# Altium PCB PCB3.PcbDoc
Units mm, origin at the board's own origin, x right, y up, seen from the top; angles counter-clockwise.
Board outline 152.4 x 101.6 mm, 2 copper layers (Top Layer, Bottom Layer); 5 components, 4 nets, 30 pads, 2 vias.
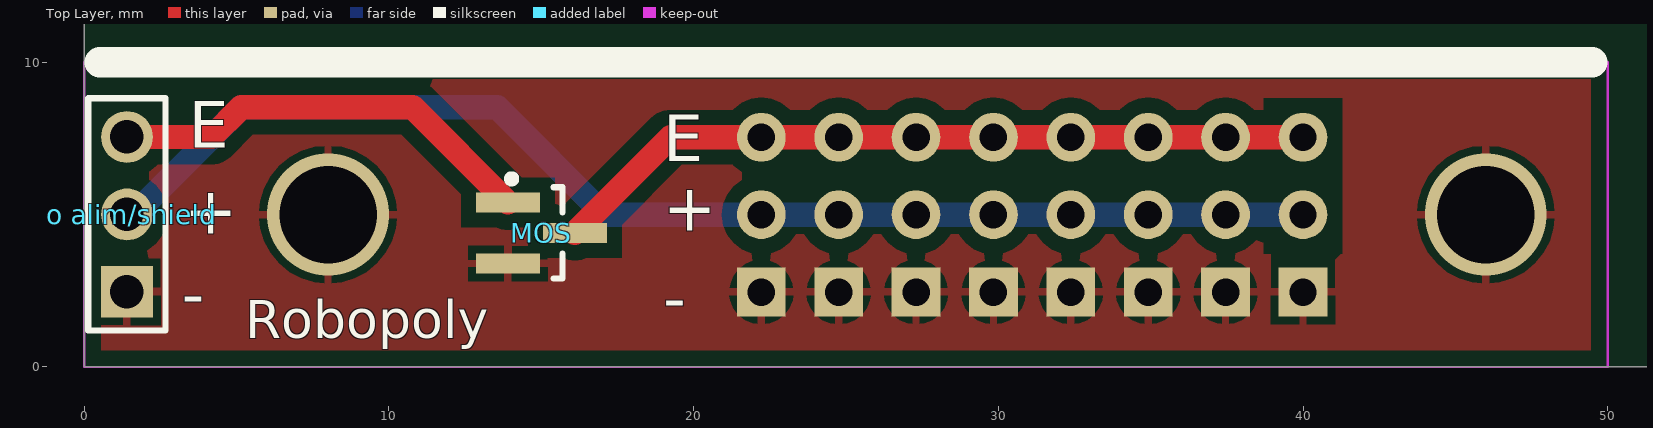
[diagram p0: Top Layer view]
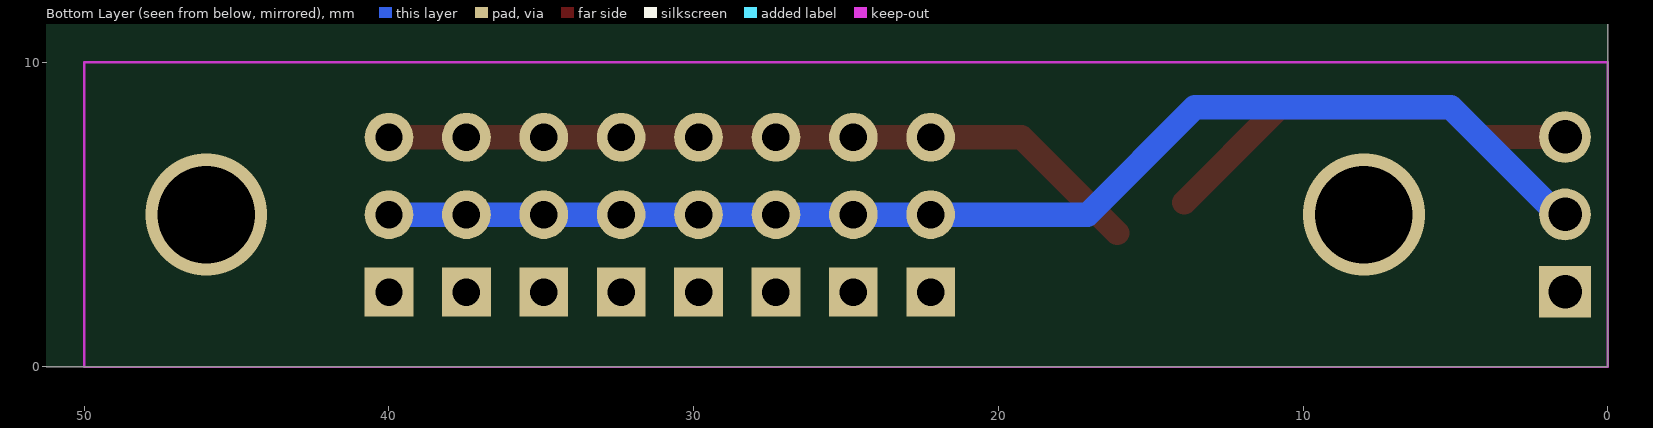
[diagram p1: Bottom Layer view, seen from below]
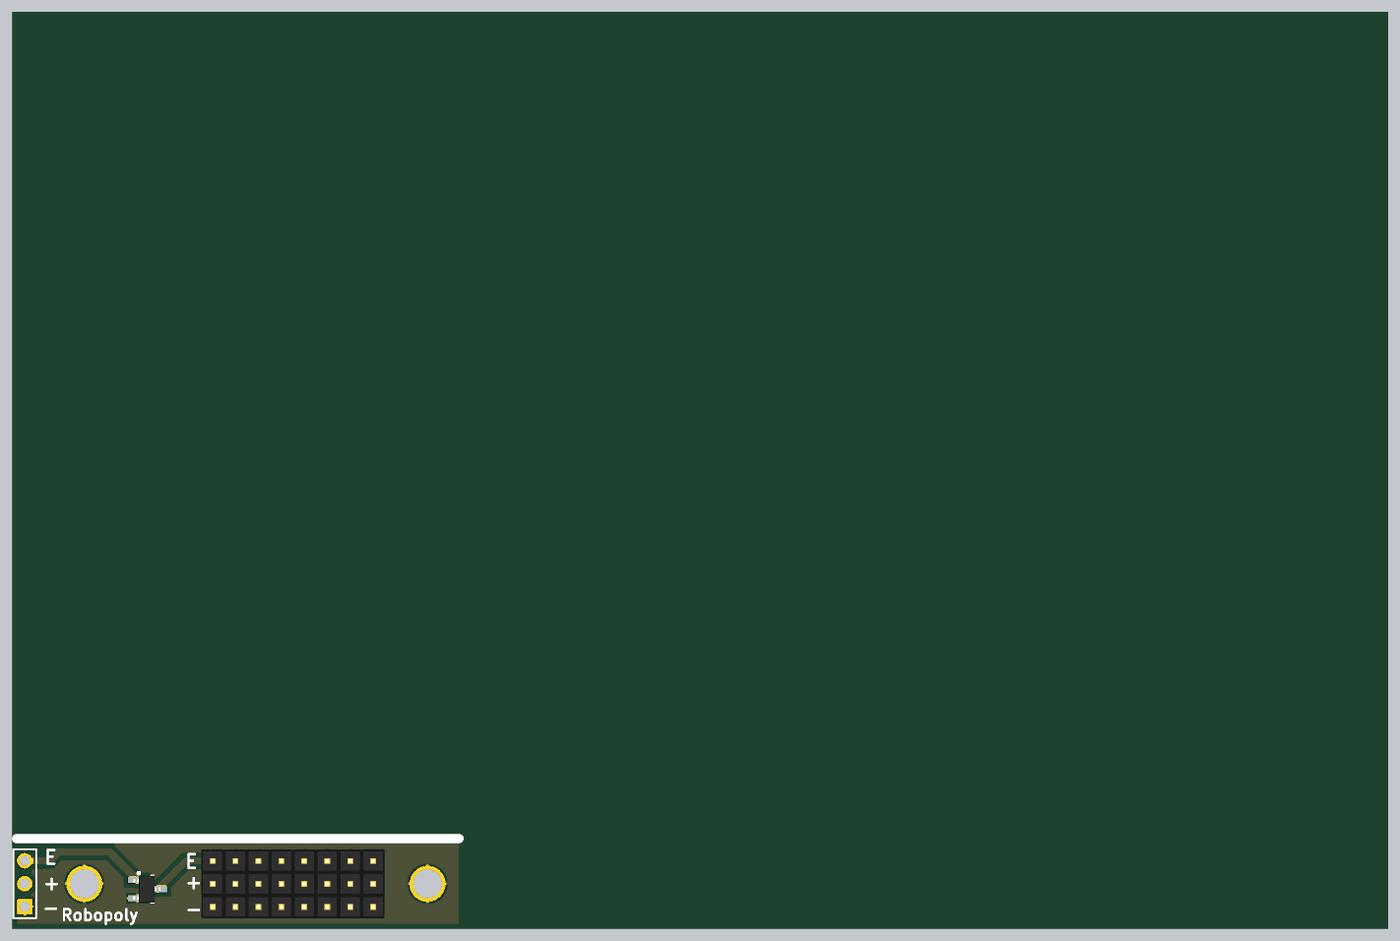
[diagram p2: 3D render of the assembled board from above, using the file's embedded part models]

## Layer stack, top to bottom
Top Layer: signal copper 0.0356
Dielectric: dielectric 0.32, FR-4, Dk 4.8
Bottom Layer: signal copper 0.0356

## Board outline
0,0 152.4,0 152.4,101.6 0,101.6

## Design rules (kind name [scope] priority, off if disabled: settings)
Clearance Clearance_Polygons [InPolygon] p1: gap=0.254
Clearance [All] p2: gap=0.15
HoleSize [All] p1: absolutevalues=TRUE maxlimit=6.2 minlimit=0.3 maxpercent=80.000 minpercent=20.000
MinimumSolderMaskSliver [All] p1 off: minsoldermaskwidth=0.15
MinimumSolderMaskSliver SilkscreenOverComponentPads [All] p2 off: minsoldermaskwidth=0.254
PolygonConnect PolygonConnect_via [All vs IsVia] p1: connectstyle=Direct reliefconductorwidth=0.254 reliefentries=4 polygonreliefangle="90 Angle" airgapwidth=0.254
PolygonConnect [All] p2: connectstyle=Relief reliefconductorwidth=0.254 reliefentries=4 polygonreliefangle="90 Angle" airgapwidth=0.254
RoutingVias [All] p1: holewidth=0.5 width=0.8 viastyle="Through Hole" minholewidth=0.35 minwidth=0.5 maxholewidth=1.5 maxwidth=2
SilkToSilkClearance [All] p1 off: silktosilkclearance=0.254
SolderMaskExpansion [All] p1: expansion=0.1
Width [All] p1: maxlimit=5 minlimit=0.2 preferedwidth=0.5
25 further rules are at their usual default settings.

## Classes and differential pairs
component class Sheet2: EN MOS "to alim/shield"

## Components (designator, comment, footprint, x,y, rotation, side; value= is the part's Value field where it differs from the comment)
+ "Header 8" HDR1X8#1 40,5 r180 top (schematic designator VCC)
- "Header 8" HDR1X8#2 40,2.46 r180 top (schematic designator GND)
E "Header 8" HDR1X8#1 40,7.54 r180 top (schematic designator ENABLE)
MOS "FDV305N" SOT23-3 15,4.4 r0 top
"to alim/shield" "Header 3" HDR1X3 1.4,7.55 r270 top

## Footprints (in the part's own frame and the unit in brackets; to place one, negate y for a bottom-side part, rotate by r counter-clockwise, add the part's x,y. Pads: shape width x height; smd on the part's side, far side on the other; paste and mask are expansions set on the pad)
HDR1X3 [mm] "Connector; Header; 3 Position"
  round 1.7 hole 1.1: 1(0,0) 2(2.54,0)
  rect 1.7x1.7 hole 1.1: 3(5.08,0)
  silkscreen extent -1.27,-1.27 6.35,1.27
HDR1X8#1 [mm] "Connector; Header; 8 Position"
  round 1.6 hole 0.9: 1(0,0) 2(2.54,0) 3(5.08,0) 4(7.62,0) 5(10.16,0) 6(12.7,0) 7(15.24,0) 8(17.78,0)
  body extent -1.25,-1.25 19.07,1.29, height 8.44
HDR1X8#2 [mm] "Connector; Header; 8 Position"
  rect 1.6x1.6 hole 0.9: 1(0,0) 2(2.54,0) 3(5.08,0) 4(7.62,0) 5(10.16,0) 6(12.7,0) 7(15.24,0) 8(17.78,0)
  body extent -1.25,-1.25 19.07,1.29, height 8.44
SOT23-3 [mm] "SOT23, 3-Leads, Body 3.0x2.6mm (max), Pitch 0.95mm, IPC Low Density"
  rect 2.1x0.65 smd: 1(-1.1,1) 2(-1.1,-1) 3(1.1,0)
  silkscreen extent -1.1,-1.5 0.7,1.9, body extent -1.57,-1.5 1.42,1.5, height 1.46

## Part data
+ - E: "Header, 8-Pin"
MOS: library part T/FDV305N, "MOSFET N SOT-23 20V 220mOhm"
"to alim/shield": "Header, 3-Pin"

## Via types
v1: diameter 4, hole 3.2, Top Layer to Bottom Layer, 2 vias

## Nets (pads, with @x,y where several pads share a name; then routed paths per layer and width w, separated by ;. In a path a pad name is that pad's centre, name@x,y a point inside that pad or via, vN(x,y) a via of type N, cw(c..) or ccw(c..) an arc to the next point about the centre after c; other vN are vias at no path point)
ENABLE: "to alim/shield.1" MOS.1 | length 14.2
  Top Layer w0.8: 1.4,7.55 4.173,7.55 5.148,8.525 10.775,8.525 MOS.1
GND: "to alim/shield.3" -.1 -.2 -.3 -.4 -.5 -.6 -.7 -.8 MOS.2
  other v1: 8,5 46,5
NetENABLE_1: E.1 E.2 E.3 E.4 E.5 E.6 E.7 E.8 MOS.3 | length 25.2
  Top Layer w0.8: MOS.3 19.24,7.54 E.8 E.7 E.6 E.5 E.4 E.3 E.2 E.1
VCC: "to alim/shield.2" +.1 +.2 +.3 +.4 +.5 +.6 +.7 +.8 | length 41.5
  Bottom Layer w0.8: 1.4,5.01 1.633,5.01 5.148,8.525 13.55,8.525 17.075,5 +.8 +.7 +.6 +.5 +.4 +.3 +.2 +.1

## Polygon pours and split planes (outlines as drawn)
GND on Top Layer "GND plane" (solid, remove dead copper, pour order 4): 0,0 0,10 50,10 50,0 0,0

## Keep-outs
Keep-Out Layer:
  lines w0.08: 0,0 50,0 50,10 0,10 0,0

## Silkscreen, mask and mechanical layers (free items; w line width, h text height)
Top Overlay:
  lines w1: 0.5,10 49.5,10
  text "E" at 3.425,7.2 h1.52
  text "+" at 3.275,4.375 h1.52
  text "-" at 3.2,1.65 h1.52
  text "Robopoly" at 5.275,0.95 h1.25
Mechanical 1:
  circle w0.254: c46,5 r2.7
  circle w0.254: c8,5 r2.7